# Altium PCB 主板-双BH(1).PcbDoc (part 9 of 13)
Units mm, origin at the board's own origin, x right, y up, seen from the top; angles counter-clockwise.
Board outline 97.69 x 103.45 mm, 2 copper layers (Top Layer, Bottom Layer); 78 components, 75 nets, 243 pads, 279 vias.
Unrouted connection lines stored in the file: 7.
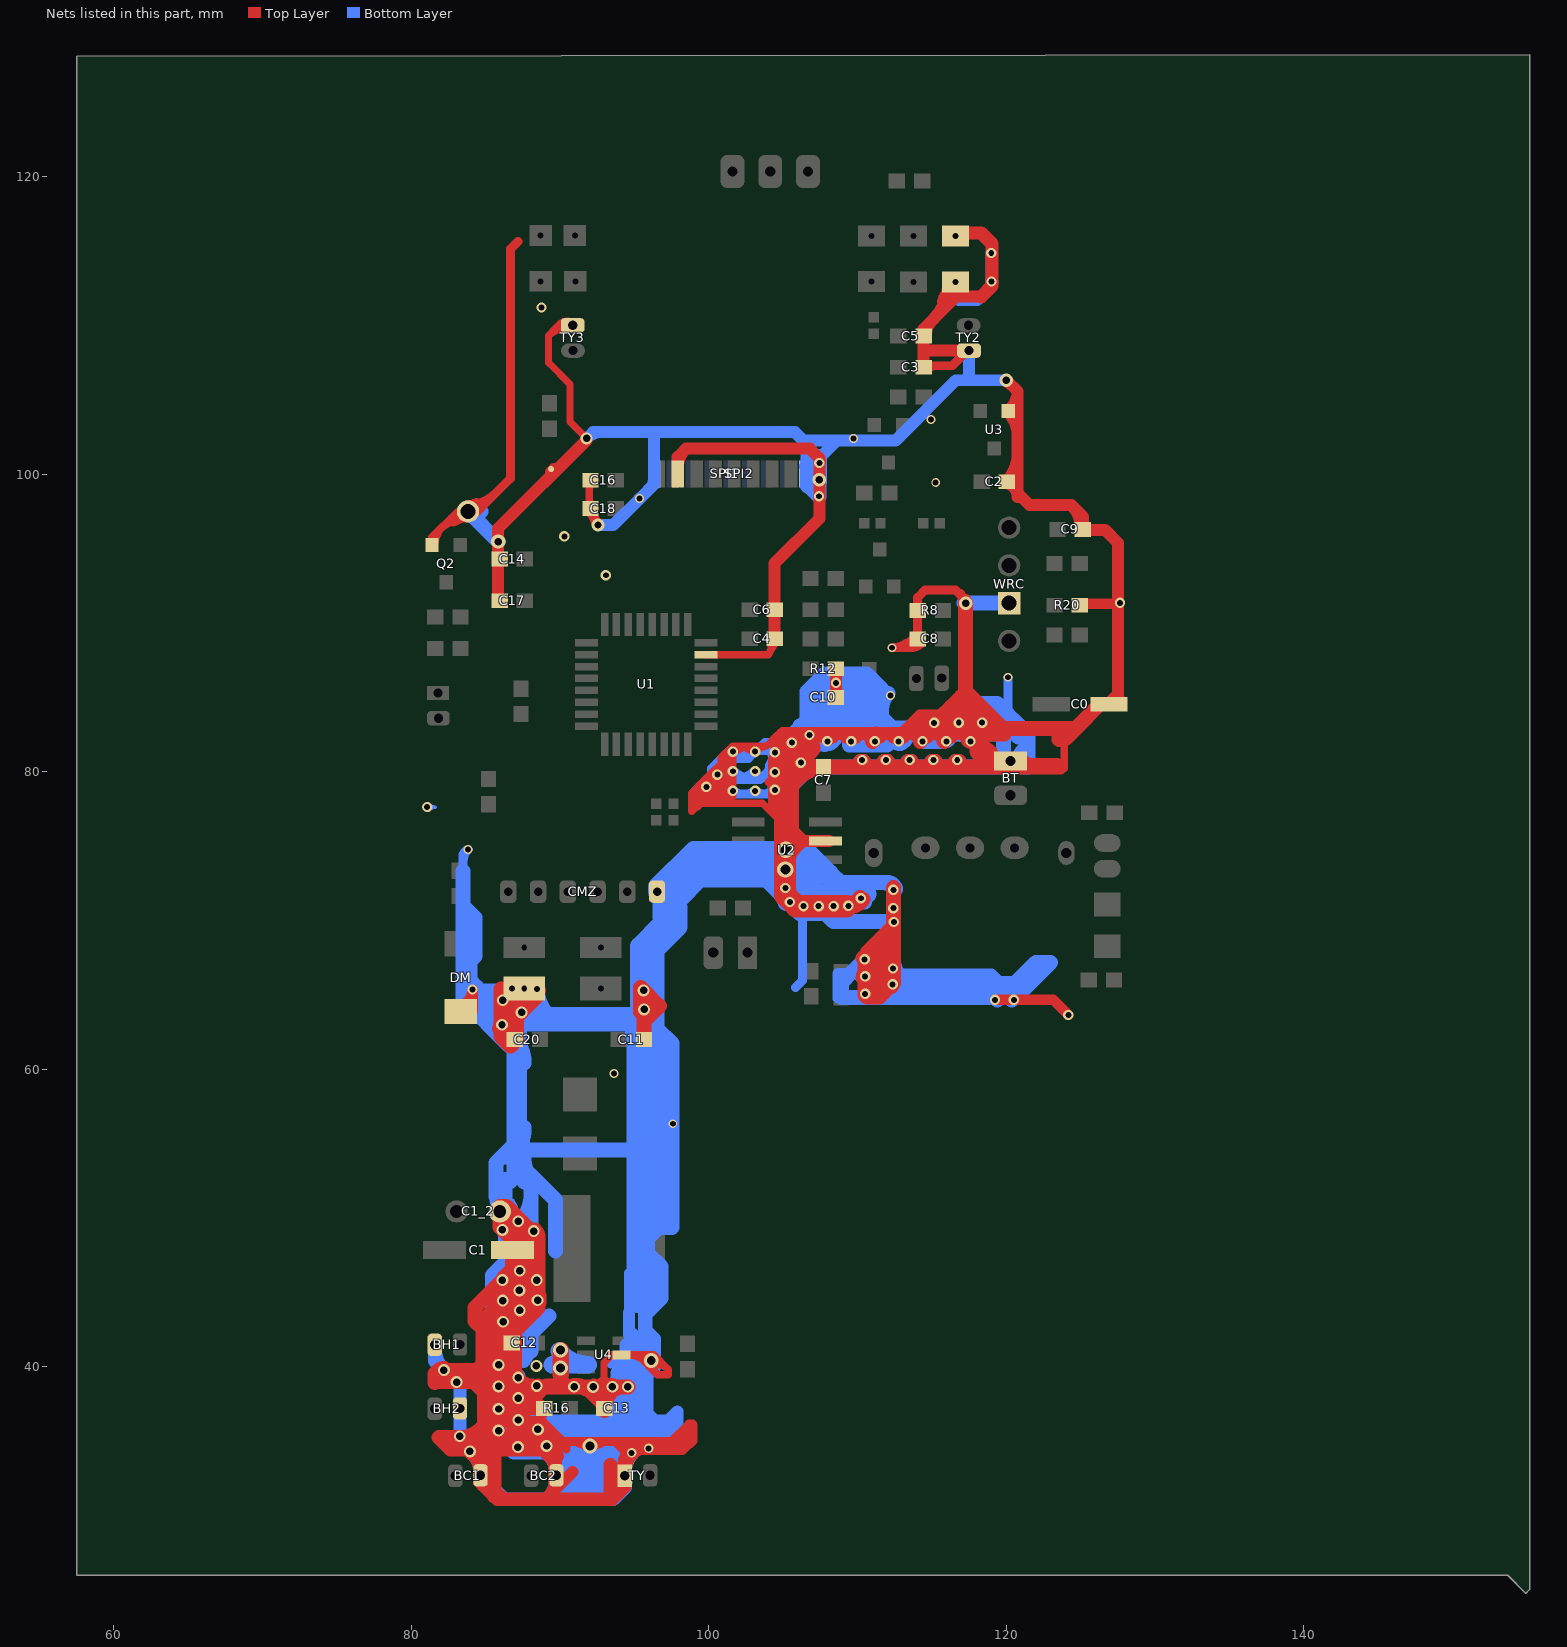
[diagram p9: the nets of this part, all layers, seen from the top]

## Via types
v1: diameter 0.7, hole 0.4, Top Layer to Bottom Layer, 108 vias
v2: diameter 0.68, hole 0.4, Top Layer to Bottom Layer, 87 vias
v3: diameter 0.8, hole 0.5, Top Layer to Bottom Layer, tented both sides, 33 vias
v4: diameter 0.6, hole 0.4, Top Layer to Bottom Layer, 12 vias
v5: diameter 0.9, hole 0.5, Top Layer to Bottom Layer, 8 vias
v6: diameter 0.8, hole 0.5, Top Layer to Bottom Layer, 6 vias
v7: diameter 1, hole 0.75, Top Layer to Bottom Layer, tented both sides, 5 vias
v8: diameter 3.4, hole 2.9, Top Layer to Bottom Layer, 4 vias
v9: diameter 1, hole 0.6, Top Layer to Bottom Layer, tented both sides, 3 vias
v10: diameter 1, hole 0.56, Top Layer to Bottom Layer, tented both sides, 2 vias
v11: diameter 1.1, hole 0.68, Top Layer to Bottom Layer, 2 vias
v12: diameter 0.8, hole 0.4, Top Layer to Bottom Layer, 2 vias
v13: diameter 0.65, hole 0.4, Top Layer to Bottom Layer, tented both sides, 2 vias
v14: diameter 1, hole 0.6, Top Layer to Bottom Layer, tented bottom, 1 vias
v15: diameter 0.7, hole 0.4, Top Layer to Bottom Layer, tented bottom, 1 vias
v16: diameter 0.95, hole 0.5, Top Layer to Bottom Layer, 1 vias
v17: diameter 0.64, hole 0.4, Top Layer to Bottom Layer, 1 vias
v18: diameter 0.62, hole 0.4, Top Layer to Bottom Layer, 1 vias

## Nets (pads, with @x,y where several pads share a name; then routed paths per layer and width w, separated by ;. In a path a pad name is that pad's centre, name@x,y a point inside that pad or via, vN(x,y) a via of type N, cw(c..) or ccw(c..) an arc to the next point about the centre after c; other vN are vias at no path point) (continued)
GND: (continued)
  Bottom Layer w1: 83.488,73.33 83.488,70.995 ; 84.072,67.384 84.285,67.597 84.285,70.198 84.072,70.411 83.488,70.995 ; v2(84.125,65.354) 84.446,65.033 ; 84.7,97.511 pad.4@83.82,97.511 v16(85.852,95.479) ; 85.15,63.969 85.595,63.627 ; 85.598,43.155 85.598,43.409 85.555,43.452 85.555,40.114 86.055,40.615 86.055,41.046 ; 85.674,41.046 86.055,41.046 ; v3@86.055,40.005 86.055,39 86.055,36.297 ; 86.055,42.215 86.055,41.046 ; 86.055,51.638 85.7,51.638 ; v3@86.177,63.063 cw(c85.121,62.007) 86.614,62.007 ; v3@86.178,64.545 ccw(c86.015,65.29) pad.0@86.657,64.878 ; 86.309,52.603 86.317,51.021 86.32,50.444 86.326,49.201 86.33,48.332 86.665,48.666 86.665,50.673 ; 86.335,47.498 86.332,48.014 ; 86.376,62.451 86.614,62.214 ; v3@86.424,64.515 ccw(c85.805,65.194) pad.0@86.706,65.373 ; pad.0@86.521,65.432 pad.0@87.6,65.432 v1(86.766,65.43) pad.0@86.664,65.429 ; 86.614,36.386 86.614,38.938 ; 86.614,39.167 86.614,38.938 ; 86.614,52.426 86.911,52.722 86.911,61.917 86.614,62.214 ; 86.614,61.684 cw(c87.515,61.684) 86.878,62.322 ; 86.807,62.322 cw(c84.893,60.408) 87.6,60.408 ; 86.868,41.021 86.893,41.046 ; 86.919,35.458 93.472,35.458 ; 86.982,55.74 86.982,54.995 85.7,53.712 85.7,51.638 ; 87.274,63.269 87.274,54.902 87.6,54.576 ; v3@87.396,44.071 86.792,43.466 ; 87.6,52.68 87.6,54.576 ; 87.8,53.119 88.062,52.857 ; 87.916,43.561 87.147,42.792 ; v3@89.129,34.9 88.697,34.9 ; 89.256,43.409 88.062,42.215 ; 89.672,36.108 92.954,36.108 ; 89.704,47.777 89.704,51.215 88.062,52.857 ; 92.481,31.14 92.954,31.14 93.574,31.14 94.336,31.902 94.336,32.522 94.082,32.776 TY.2@94.082,33.096 ; 93.223,32.7 92.804,32.7 ; 93.604,32.085 93.604,33.426 ; 93.659,31.845 92.804,32.7 ; 93.721,31.907 93.659,31.969 93.574,32.055 ; 93.955,35.636 93.955,34.976 93.98,34.95 94.386,34.95 94.488,34.849 ; 94.183,33.884 94.488,34.188 ; 94.488,35.707 94.488,34.849 ; 94.615,37.186 94.656,37.144 ; 94.656,36.432 94.656,37.144 ; 94.742,36.108 94.092,36.108 ; 94.793,42.164 95.783,41.173 ; 94.92,41.758 94.92,39.345 95.783,40.208 95.783,41.173 ; 94.971,62.407 94.971,54.576 ; 95.098,49.835 95.758,50.495 ; 95.148,44.653 95.225,44.729 ; 95.148,46.228 95.148,46.076 ; 95.225,37.391 95.225,39.649 ; 95.225,44.12 95.225,44.729 ; 95.244,34.945 95.148,34.849 94.818,34.519 94.488,34.188 ; 95.326,48.844 95.326,48.057 95.898,48.628 ; 95.326,50.927 95.326,51.155 ; 95.326,62.763 95.326,54.576 94.971,54.576 ; 95.327,61.713 cw(c97.266,61.713) 95.895,63.084 ; 95.327,62.763 96.52,62.763 ; 95.824,63.084 cw(c94.758,62.017) 96.266,62.017 ; 95.838,63.074 cw(c95.5,62.386) 96.266,62.386 ; 95.858,63.069 cw(c95.831,62.381) 96.52,62.381 ; 95.898,44.552 95.898,45.402 ; 95.898,47.384 95.898,45.402 ; 95.898,49.416 95.898,48.984 ; 95.904,63.142 ccw(c96.52,63.454) 96.52,62.763 ; 95.961,49.708 96.19,49.708 ; 96.284,35.456 96.314,35.486 94.656,37.144 ; 96.441,35.486 96.7,35.486 97.231,36.017 ; 96.52,68.123 96.52,62.763 ; CMZ.2@96.53,71.944 97.866,71.944 ; 96.622,49.708 95.898,48.984 ; 96.977,49.708 95.898,48.628 ; 97.18,36.297 96.319,36.297 95.782,36.834 95.782,39.47 ; 103.745,72.836 106.096,70.485 106.319,70.485 107.823,70.485 ; v11(105.181,74.752) 106.705,74.752 108.179,73.279 108.179,73.254 ; 106.136,72.507 106.451,72.822 106.959,73.33 ; v1@106.782,82.524 v1@106.87,82.436 ; v1@107.417,98.501 v1(107.417,98.527) ; v5@107.417,99.593 v1(107.417,98.527) ; v5@107.442,99.492 v5(107.442,99.644) v1(107.442,100.762) v1@107.442,101.092 ; v1@108.179,70.915 v1@108.179,70.917 ; 108.179,71.806 108.179,72.517 ; 109.195,71.501 108.636,72.06 108.179,72.517 ; v1@109.449,71.247 110.49,71.247 v1(110.236,71.501) ; 109.466,86.335 109.466,82.525 ; 109.728,86.233 110.363,85.598 110.363,82.781 110.583,82.561 ; 109.957,66.523 112.166,66.523 112.42,66.269 ; 111.049,85.649 111.049,83.026 110.583,82.561 ; 112.598,65.227 113.005,64.821 ; 113.342,82.448 113.342,82.525 ; v1(114.375,82.042) 115.545,82.042 116.027,82.525 ; v5@117.17,91.345 WRC.2@120.2,91.345 ; BT.2@120.297,80.674 BT.2@120.297,80.315 ; 120.371,65.507 120.802,65.938 ; 120.828,82.321 119.99,83.16 119.99,83.287 ; 120.853,65.735 119.939,64.821 ; 83.488,66.505 ccw(c85.276,66.505) v2@84.012,65.241 ; 83.488,66.505 ccw(c85.276,66.505) v2@84.012,65.241 ; 83.488,66.505 ccw(c85.276,66.505) v2@84.012,65.241 ; 83.488,70.995 83.488,69.826 83.488,68.916 83.488,64.696 86.614,61.57 86.614,62.214 ; v2@83.965,65.354 ccw(c84.673,65.354) 84.172,64.853 ; v2@83.965,65.354 ccw(c84.673,65.354) 84.172,64.853 ; v2@83.965,65.354 ccw(c84.673,65.354) 84.172,64.853 ; v2@83.965,65.354 ccw(c84.673,65.354) 84.172,64.853 ; v2@83.965,65.354 ccw(c84.673,65.354) 84.172,64.853 ; v2@84.012,65.241 ccw(c84.514,65.744) 84.514,65.033 cw(c84.514,65.744) v2@84.012,65.241 ; 84.172,64.853 85.399,63.627 ; 84.172,64.853 84.352,65.033 84.446,65.033 ; 84.446,65.033 85.852,63.627 ; 84.446,65.033 85.647,65.033 ; 84.716,63.468 ccw(c86.106,64.858) v3@86.106,62.892 ; 84.716,63.468 ccw(c86.106,64.858) v3@86.106,62.892 ; 84.716,63.468 ccw(c86.106,64.858) v3@86.106,62.892 ; 85.399,63.627 cw(c85.399,62.792) v3@86.202,63.019 ; 85.399,63.627 cw(c85.399,62.792) v3@86.202,63.019 ; 85.399,63.627 cw(c85.399,62.792) v3@86.202,63.019 ; 85.399,63.627 85.595,63.627 ; 85.471,36.42 cw(c86.617,36.42) v3@85.807,37.231 ; 85.471,36.42 cw(c86.617,36.42) v3@85.807,37.231 ; 85.471,36.42 cw(c86.617,36.42) v3@85.807,37.231 ; 85.471,36.452 ccw(c86.617,36.452) v3@85.807,35.642 ; 85.471,36.452 ccw(c86.617,36.452) v3@85.807,35.642 ; 85.471,36.452 ccw(c86.617,36.452) v3@85.807,35.642 ; 85.471,37.9 ccw(c86.617,37.9) v3@85.807,37.089 ; 85.471,37.9 ccw(c86.617,37.9) v3@85.807,37.089 ; 85.471,37.9 ccw(c86.617,37.9) v3@85.807,37.089 ; 85.471,37.944 cw(c86.617,37.944) v3@85.807,38.755 ; 85.471,37.944 cw(c86.617,37.944) v3@85.807,38.755 ; 85.471,37.944 cw(c86.617,37.944) v3@85.807,38.755 ; 85.471,39.392 cw(c86.617,39.392) v3@85.807,40.203 ; 85.471,39.392 cw(c86.617,39.392) v3@85.807,40.203 ; 85.471,39.392 cw(c86.617,39.392) v3@85.807,40.203 ; 85.471,39.424 ccw(c86.617,39.424) v3@85.807,38.613 ; 85.471,39.424 ccw(c86.617,39.424) v3@85.807,38.613 ; 85.471,39.424 ccw(c86.617,39.424) v3@85.807,38.613 ; 85.471,40.872 ccw(c86.617,40.872) v3@85.807,40.061 ; 85.471,40.872 ccw(c86.617,40.872) v3@85.807,40.061 ; 85.471,40.872 ccw(c86.617,40.872) v3@85.807,40.061 ; 85.471,41.552 cw(c87.658,41.552) v3@86.111,43.098 ; 85.471,41.552 cw(c87.658,41.552) v3@86.111,43.098 ; 85.471,41.552 cw(c87.658,41.552) v3@86.111,43.098 ; 85.471,43.036 cw(c87.571,43.036) v3@86.086,44.521 ; 85.471,43.036 cw(c87.571,43.036) v3@86.086,44.521 ; 85.471,43.036 cw(c87.571,43.036) v3@86.086,44.521 ; 85.471,44.469 cw(c87.484,44.469) v3@86.061,45.892 ; 85.471,44.469 cw(c87.484,44.469) v3@86.061,45.892 ; 85.471,44.469 cw(c87.484,44.469) v3@86.061,45.892 ; 85.471,44.503 ccw(c87.658,44.503) v3@86.111,42.957 ; 85.471,44.503 ccw(c87.658,44.503) v3@86.111,42.957 ; 85.471,44.503 ccw(c87.658,44.503) v3@86.111,42.957 ; 85.471,45.864 ccw(c87.571,45.864) v3@86.086,44.379 ; 85.471,45.864 ccw(c87.571,45.864) v3@86.086,44.379 ; 85.471,45.864 ccw(c87.571,45.864) v3@86.086,44.379 ; 85.555,40.669 ccw(c86.415,40.669) v3@85.807,40.061 ; 85.555,40.669 ccw(c86.415,40.669) v3@85.807,40.061 ; 85.555,40.669 ccw(c86.415,40.669) v3@85.807,40.061 ; 85.555,41.754 cw(c87.455,41.754) v3@86.111,43.098 ; 85.555,41.754 cw(c87.455,41.754) v3@86.111,43.098 ; 85.555,41.754 cw(c87.455,41.754) v3@86.111,43.098 ; 85.595,63.627 85.852,63.627 ; 85.595,63.627 85.941,63.36 86.208,63.627 ; 85.647,65.033 cw(c85.647,64.34) 86.243,64.694 ccw(c85.647,64.34) 85.647,65.033 ; 85.647,65.033 86.157,64.523 86.157,63.754 ; 85.7,51.638 cw(c85.149,51.087) C1_2.1@85.755,50.599 ; 85.7,51.638 ccw(c87.13,51.638) C1_2.1@86.126,50.62 ; 85.7,51.638 cw(c85.149,51.087) C1_2.1@85.755,50.599 ; 85.7,51.638 ccw(c87.13,51.638) C1_2.1@86.126,50.62 ; 85.7,51.638 cw(c85.149,51.087) C1_2.1@85.755,50.599 ; 85.7,51.638 ccw(c87.13,51.638) C1_2.1@86.126,50.62 ; 85.7,51.638 86.665,50.673 ; 85.7,51.65 ccw(c87.158,51.65) C1_2.1@86.127,50.619 ; 85.7,51.65 ccw(c87.158,51.65) C1_2.1@86.127,50.619 ; 85.7,51.65 ccw(c87.158,51.65) C1_2.1@86.127,50.619 ; C1_2.1@85.772,50.618 ccw(c84.446,51.931) 86.312,51.94 ; C1_2.1@85.772,50.618 ccw(c84.446,51.931) 86.312,51.94 ; C1_2.1@85.772,50.618 ccw(c84.446,51.931) 86.312,51.94 ; C1_2.1@85.774,50.264 cw(c84.461,48.938) v3@86.327,48.947 ; C1_2.1@85.774,50.264 cw(c84.461,48.938) v3@86.327,48.947 ; C1_2.1@85.774,50.264 cw(c84.461,48.938) v3@86.327,48.947 ; v3@85.777,35.712 ccw(c86.578,35.712) 86.012,35.146 ; v3@85.777,35.712 ccw(c86.578,35.712) 86.012,35.146 ; v3@85.777,35.712 ccw(c86.578,35.712) 86.012,35.146 ; v3@85.777,37.16 ccw(c87.192,37.16) 86.192,36.16 ; v3@85.777,37.16 ccw(c87.192,37.16) 86.192,36.16 ; v3@85.777,37.16 ccw(c87.192,37.16) 86.192,36.16 ; v3@85.779,37.178 ccw(c86.76,37.001) 86.055,36.297 ; v3@85.779,37.178 ccw(c86.76,37.001) 86.055,36.297 ; v3@85.779,37.178 ccw(c86.76,37.001) 86.055,36.297 ; C1_2.1@85.801,50.241 cw(c84.534,48.528) 86.665,48.528 ; C1_2.1@85.801,50.241 cw(c84.534,48.528) 86.665,48.528 ; C1_2.1@85.801,50.241 cw(c84.534,48.528) 86.665,48.528 ; v3@85.807,35.783 cw(c87.046,34.543) v3@87.046,36.297 ; v3@85.807,35.783 cw(c87.046,34.543) v3@87.046,36.297 ; v3@85.807,35.783 cw(c87.046,34.543) v3@87.046,36.297 ; v3@85.807,37.089 ccw(c87.721,39.004) 87.721,36.297 ; v3@85.807,37.089 ccw(c87.721,39.004) 87.721,36.297 ; v3@85.807,37.089 ccw(c87.721,39.004) 87.721,36.297 ; 85.852,63.627 85.941,63.538 86.03,63.627 ; 85.852,63.627 86.03,63.627 ; v3@85.877,35.812 cw(c85.877,34.214) 87.008,35.344 ; v3@85.877,35.812 cw(c85.877,34.214) 87.008,35.344 ; v3@85.877,35.812 cw(c85.877,34.214) 87.008,35.344 ; v3@85.925,37.248 cw(c85.298,36.091) 86.614,36.091 ; v3@85.925,37.248 cw(c85.298,36.091) 86.614,36.091 ; v3@85.925,37.248 cw(c85.298,36.091) 86.614,36.091 ; v3@85.948,37.089 ccw(c84.341,38.697) 86.614,38.697 ; v3@85.948,37.089 ccw(c84.341,38.697) 86.614,38.697 ; v3@85.948,37.089 ccw(c84.341,38.697) 86.614,38.697 ; v3@85.948,38.755 cw(c84.341,37.147) 86.614,37.147 ; v3@85.948,38.755 cw(c84.341,37.147) 86.614,37.147 ; v3@85.948,38.755 cw(c84.341,37.147) 86.614,37.147 ; 85.95,42.624 85.95,42.472 86.792,43.314 86.792,43.466 ; 85.95,42.624 86.792,43.466 ; 85.95,42.624 85.95,46.405 86.332,46.787 ; C1_2.1@85.976,50.028 cw(c85.093,49.302) v3@86.231,49.19 ; C1_2.1@85.976,50.028 cw(c85.093,49.302) v3@86.231,49.19 ; C1_2.1@85.976,50.028 cw(c85.093,49.302) v3@86.231,49.19 ; C1_2.1@85.976,50.028 cw(c85.093,49.302) v3@86.231,49.19 ; C1_2.1@85.976,50.028 cw(c85.093,49.302) v3@86.231,49.19 ; C1_2.1@85.976,50.028 cw(c85.093,49.302) v3@86.231,49.19 ; v3@86.006,62.992 ccw(c87.972,62.992) 86.582,61.602 ; v3@86.006,62.992 ccw(c87.972,62.992) 86.582,61.602 ; v3@86.006,62.992 ccw(c87.972,62.992) 86.582,61.602 ; 86.007,63.472 cw(c85.528,62.992) v3@86.206,62.992 ; 86.007,63.472 cw(c85.528,62.992) v3@86.206,62.992 ; 86.007,63.472 cw(c85.528,62.992) v3@86.206,62.992 ; 86.007,63.472 cw(c85.528,62.992) v3@86.206,62.992 ; 86.007,63.472 cw(c85.528,62.992) v3@86.206,62.992 ; 86.007,63.472 cw(c85.528,62.992) v3@86.206,62.992 ; 86.007,63.472 cw(c85.528,62.992) v3@86.206,62.992 ; 86.007,63.472 cw(c85.528,62.992) v3@86.206,62.992 ; v3@86.008,62.973 cw(c86.722,63.112) 86.208,63.627 ; v3@86.008,62.973 cw(c86.722,63.112) 86.208,63.627 ; v3@86.008,62.973 cw(c86.722,63.112) 86.208,63.627 ; 86.03,63.627 ccw(c85.335,64.321) 86.25,64.679 cw(c85.335,64.321) 86.03,63.627 ; 86.03,63.627 86.157,63.754 ; 86.03,63.627 86.208,63.627 ; v3@86.031,45.822 cw(c88.182,45.822) 86.661,47.342 ; v3@86.031,45.822 cw(c88.182,45.822) 86.661,47.342 ; v3@86.031,45.822 cw(c88.182,45.822) 86.661,47.342 ; v3@86.033,45.802 cw(c87.104,46.015) 86.332,46.787 ; v3@86.033,45.802 cw(c87.104,46.015) 86.332,46.787 ; v3@86.033,45.802 cw(c87.104,46.015) 86.332,46.787 ; 86.048,41.046 cw(c86.048,38.931) 87.544,40.427 ; 86.048,41.046 cw(c86.048,38.931) 87.544,40.427 ; 86.048,41.046 cw(c86.048,38.931) 87.544,40.427 ; 86.055,36.297 92.765,36.297 92.954,36.108 ; 86.055,36.297 87.452,34.9 ; 86.055,41.046 86.893,41.046 ; v3@86.154,64.543 ccw(c86.175,65.306) pad.0@86.7,64.751 ; v3@86.154,64.543 ccw(c86.175,65.306) pad.0@86.7,64.751 ; v3@86.154,64.543 ccw(c86.175,65.306) pad.0@86.7,64.751 ; 86.157,63.754 ccw(c85.635,64.276) 86.239,64.701 cw(c85.635,64.276) 86.157,63.754 ; 86.157,63.754 ccw(c86.66,63.251) 86.015,62.95 cw(c86.66,63.251) 86.157,63.754 ; 86.168,49.606 cw(c86.952,49.962) C1_2.1@86.175,50.334 ; 86.168,49.606 cw(c86.952,49.962) C1_2.1@86.175,50.334 ; 86.168,49.606 cw(c86.952,49.962) C1_2.1@86.175,50.334 ; 86.168,49.606 cw(c86.952,49.962) C1_2.1@86.175,50.334 ; v3@86.168,62.913 ccw(c85.444,63.833) 86.614,63.833 ; v3@86.168,62.913 ccw(c85.444,63.833) 86.614,63.833 ; v3@86.168,62.913 ccw(c85.444,63.833) 86.614,63.833 ; C1_2.1@86.17,50.56 cw(c86.874,50.937) 86.181,51.333 ; C1_2.1@86.17,50.56 cw(c86.874,50.937) 86.181,51.333 ; C1_2.1@86.17,50.56 cw(c86.874,50.937) 86.181,51.333 ; C1_2.1@86.172,50.327 ccw(c86.892,49.956) v3@86.193,49.547 ; C1_2.1@86.172,50.327 ccw(c86.892,49.956) v3@86.193,49.547 ; C1_2.1@86.172,50.327 ccw(c86.892,49.956) v3@86.193,49.547 ; v3@86.182,49.286 cw(c85.692,48.445) 86.665,48.445 ; v3@86.182,49.286 cw(c85.692,48.445) 86.665,48.445 ; v3@86.182,49.286 cw(c85.692,48.445) 86.665,48.445 ; v3@86.182,49.286 cw(c85.692,48.445) 86.665,48.445 ; v3@86.182,49.286 cw(c85.692,48.445) 86.665,48.445 ; v3@86.182,49.286 cw(c85.692,48.445) 86.665,48.445 ; v3@86.185,49.284 cw(c85.632,48.411) 86.64,48.638 ; v3@86.185,49.284 cw(c85.632,48.411) 86.64,48.638 ; v3@86.185,49.284 cw(c85.632,48.411) 86.64,48.638 ; v3@86.185,49.284 cw(c85.632,48.411) 86.64,48.638 ; v3@86.185,49.284 cw(c85.632,48.411) 86.64,48.638 ; v3@86.185,49.284 cw(c85.632,48.411) 86.64,48.638 ; C1_2.1@86.197,50.402 ccw(c87.434,50.202) v3@86.453,49.421 ; C1_2.1@86.197,50.402 ccw(c87.434,50.202) v3@86.453,49.421 ; C1_2.1@86.197,50.402 ccw(c87.434,50.202) v3@86.453,49.421 ; 86.199,51.149 cw(c85.95,50.441) 86.675,50.635 ; 86.199,51.149 cw(c85.95,50.441) 86.675,50.635 ; 86.199,51.149 cw(c85.95,50.441) 86.675,50.635 ; v3@86.202,45.751 ccw(c84.778,47.175) 86.792,47.175 ; v3@86.202,45.751 ccw(c84.778,47.175) 86.792,47.175 ; v3@86.202,45.751 ccw(c84.778,47.175) 86.792,47.175 ; v3@86.202,45.892 cw(c84.778,44.469) 86.792,44.469 ; v3@86.202,45.892 cw(c84.778,44.469) 86.792,44.469 ; v3@86.202,45.892 cw(c84.778,44.469) 86.792,44.469 ; v3@86.202,49.129 ccw(c85.085,50.246) C1_2.1@86.665,50.246 ; v3@86.202,49.129 ccw(c85.085,50.246) C1_2.1@86.665,50.246 ; v3@86.202,49.129 ccw(c85.085,50.246) C1_2.1@86.665,50.246 ; v3@86.222,44.526 cw(c85.143,43.279) 86.792,43.279 ; v3@86.222,44.526 cw(c85.143,43.279) 86.792,43.279 ; v3@86.222,44.526 cw(c85.143,43.279) 86.792,43.279 ; v3@86.228,44.379 ccw(c84.865,45.742) 86.792,45.742 ; v3@86.228,44.379 ccw(c84.865,45.742) 86.792,45.742 ; v3@86.228,44.379 ccw(c84.865,45.742) 86.792,45.742 ; pad.0@86.244,64.693 cw(c85.603,64.327) 86.315,64.132 ; pad.0@86.244,64.693 cw(c85.603,64.327) 86.315,64.132 ; pad.0@86.244,64.693 cw(c85.603,64.327) 86.315,64.132 ; v3@86.253,42.957 ccw(c84.952,44.258) 86.792,44.258 ; v3@86.253,42.957 ccw(c84.952,44.258) 86.792,44.258 ; v3@86.253,42.957 ccw(c84.952,44.258) 86.792,44.258 ; 86.303,34.855 ccw(c87.173,35.725) v3@87.173,34.495 ; 86.303,34.855 ccw(c87.173,35.725) v3@87.173,34.495 ; 86.303,34.855 ccw(c87.173,35.725) v3@87.173,34.495 ; 86.332,46.787 86.332,48.014 ; 86.332,48.014 86.792,48.473 86.792,43.466 ; 86.332,48.014 87.333,48.014 85.471,46.152 85.471,39 85.471,35.687 86.893,34.265 88.925,34.265 v3@89.002,34.341 ; pad.0@86.396,64.909 ccw(c86.097,65.748) pad.0@86.902,65.366 ; pad.0@86.396,64.909 ccw(c86.097,65.748) pad.0@86.902,65.366 ; pad.0@86.396,64.909 ccw(c86.097,65.748) pad.0@86.902,65.366 ; 86.614,36.727 cw(c88.367,36.727) v3@87.127,37.967 ; 86.614,36.727 cw(c88.367,36.727) v3@87.127,37.967 ; 86.614,36.727 cw(c88.367,36.727) v3@87.127,37.967 ; 86.614,37.592 ccw(c88.367,37.592) v3@87.127,36.352 ; 86.614,37.592 ccw(c88.367,37.592) v3@87.127,36.352 ; 86.614,37.592 ccw(c88.367,37.592) v3@87.127,36.352 ; 86.614,38.099 cw(c88.367,38.099) v3@87.127,39.339 ; 86.614,38.099 cw(c88.367,38.099) v3@87.127,39.339 ; 86.614,38.099 cw(c88.367,38.099) v3@87.127,39.339 ; 86.614,38.597 cw(c87.421,38.597) v3@87.167,39.363 ; 86.614,38.597 cw(c87.421,38.597) v3@87.167,39.363 ; 86.614,38.597 cw(c87.421,38.597) v3@87.167,39.363 ; 86.614,38.597 cw(c87.421,38.597) v3@87.167,39.363 ; 86.614,38.597 cw(c87.421,38.597) v3@87.167,39.363 ; 86.614,38.597 cw(c87.421,38.597) v3@87.167,39.363 ; 86.614,38.675 cw(c87.319,38.675) v3@87.178,39.366 ; 86.614,38.675 cw(c87.319,38.675) v3@87.178,39.366 ; 86.614,38.675 cw(c87.319,38.675) v3@87.178,39.366 ; 86.614,38.938 ccw(c88.078,38.938) v3@87.134,37.82 ; 86.614,38.938 ccw(c88.078,38.938) v3@87.134,37.82 ; 86.614,38.938 ccw(c88.078,38.938) v3@87.134,37.82 ; 86.614,62.109 cw(c89.148,62.109) v3@87.356,63.901 ; 86.614,62.109 cw(c89.148,62.109) v3@87.356,63.901 ; 86.614,62.109 cw(c89.148,62.109) v3@87.356,63.901 ; 86.614,62.214 86.614,63.833 ; 86.665,48.738 cw(c88.245,48.738) v3@87.127,49.855 ; 86.665,48.738 cw(c88.245,48.738) v3@87.127,49.855 ; 86.665,48.738 cw(c88.245,48.738) v3@87.127,49.855 ; 86.665,50.673 ccw(c87.893,50.673) v3@87.137,49.705 ; 86.665,50.673 ccw(c87.893,50.673) v3@87.137,49.705 ; 86.665,50.673 ccw(c87.893,50.673) v3@87.137,49.705 ; 86.731,53.985 ccw(c84.633,56.083) 87.6,56.083 ; 86.731,53.985 ccw(c84.633,56.083) 87.6,56.083 ; 86.731,53.985 ccw(c84.633,56.083) 87.6,56.083 ; 86.742,53.906 cw(c85.902,52.43) 87.6,52.43 ; 86.742,53.906 cw(c85.902,52.43) 87.6,52.43 ; 86.742,53.906 cw(c85.902,52.43) 87.6,52.43 ; 86.792,43.094 cw(c87.689,43.094) v3@87.251,43.877 ; 86.792,43.094 cw(c87.689,43.094) v3@87.251,43.877 ; 86.792,43.094 cw(c87.689,43.094) v3@87.251,43.877 ; 86.792,43.187 cw(c87.54,43.187) v3@87.263,43.882 ; 86.792,43.187 cw(c87.54,43.187) v3@87.263,43.882 ; 86.792,43.187 cw(c87.54,43.187) v3@87.263,43.882 ; 86.792,43.187 cw(c87.54,43.187) v3@87.263,43.882 ; 86.792,43.187 cw(c87.54,43.187) v3@87.263,43.882 ; 86.792,43.187 cw(c87.54,43.187) v3@87.263,43.882 ; 86.792,44.212 cw(c88.198,44.212) v3@87.204,45.207 ; 86.792,44.212 cw(c88.198,44.212) v3@87.204,45.207 ; 86.792,44.212 cw(c88.198,44.212) v3@87.204,45.207 ; 86.792,44.775 ccw(c88.285,44.775) v3@87.229,43.719 ; 86.792,44.775 ccw(c88.285,44.775) v3@87.229,43.719 ; 86.792,44.775 ccw(c88.285,44.775) v3@87.229,43.719 ; 86.792,45.472 cw(c88.285,45.472) v3@87.229,46.527 ; 86.792,45.472 cw(c88.285,45.472) v3@87.229,46.527 ; 86.792,45.472 cw(c88.285,45.472) v3@87.229,46.527 ; 86.792,46.059 ccw(c88.198,46.059) v3@87.204,45.065 ; 86.792,46.059 ccw(c88.198,46.059) v3@87.204,45.065 ; 86.792,46.059 ccw(c88.198,46.059) v3@87.204,45.065 ; 86.792,47.442 ccw(c88.285,47.442) v3@87.229,46.386 ; 86.792,47.442 ccw(c88.285,47.442) v3@87.229,46.386 ; 86.792,47.442 ccw(c88.285,47.442) v3@87.229,46.386 ; 86.893,41.046 86.893,42.088 88.062,43.256 ; 86.893,41.046 88.062,41.046 88.062,42.215 ; 86.93,35.421 cw(c86.104,34.595) v3@87.273,34.595 ; 86.93,35.421 cw(c86.104,34.595) v3@87.273,34.595 ; 86.93,35.421 cw(c86.104,34.595) v3@87.273,34.595 ; v3@87.102,34.524 ccw(c87.729,35.151) 87.729,34.265 ; v3@87.102,34.524 ccw(c87.729,35.151) 87.729,34.265 ; v3@87.102,34.524 ccw(c87.729,35.151) 87.729,34.265 ; v3@87.102,34.666 cw(c87.667,34.1) 87.667,34.9 ; v3@87.102,34.666 cw(c89.016,32.751) 89.016,35.458 ; v3@87.102,34.666 cw(c87.667,34.1) 87.667,34.9 ; v3@87.102,34.666 cw(c89.016,32.751) 89.016,35.458 ; v3@87.102,34.666 cw(c87.667,34.1) 87.667,34.9 ; v3@87.102,34.666 cw(c89.016,32.751) 89.016,35.458 ; v3@87.104,36.456 ccw(c88.505,35.952) 87.452,34.9 ; v3@87.104,36.456 ccw(c88.505,35.952) 87.452,34.9 ; v3@87.104,36.456 ccw(c88.505,35.952) 87.452,34.9 ; 87.147,42.792 ccw(c86.431,43.509) v3@87.395,43.82 ; 87.147,42.792 ccw(c86.431,43.509) v3@87.395,43.82 ; 87.147,42.792 ccw(c86.431,43.509) v3@87.395,43.82 ; 87.181,35.37 cw(c86.312,34.868) v3@87.268,34.565 ; 87.181,35.37 cw(c86.312,34.868) v3@87.268,34.565 ; 87.181,35.37 cw(c86.312,34.868) v3@87.268,34.565 ; v3@87.269,49.713 ccw(c85.355,51.627) 88.062,51.627 ; v3@87.269,49.713 ccw(c85.355,51.627) 88.062,51.627 ; v3@87.269,49.713 ccw(c85.355,51.627) 88.062,51.627 ; v3@87.269,49.855 cw(c85.355,47.941) 88.062,47.941 ; v3@87.269,49.855 cw(c85.355,47.941) 88.062,47.941 ; v3@87.269,49.855 cw(c85.355,47.941) 88.062,47.941 ; v3@87.333,43.884 cw(c86.977,42.859) 88.062,42.859 ; v3@87.333,43.884 cw(c86.977,42.859) 88.062,42.859 ; v3@87.333,43.884 cw(c86.977,42.859) 88.062,42.859 ; v3@87.345,45.065 ccw(c85.615,46.795) 88.062,46.795 ; v3@87.345,45.065 ccw(c85.615,46.795) 88.062,46.795 ; v3@87.345,45.065 ccw(c85.615,46.795) 88.062,46.795 ; v3@87.345,45.207 cw(c85.615,43.476) 88.062,43.476 ; v3@87.345,45.207 cw(c85.615,43.476) 88.062,43.476 ; v3@87.345,45.207 cw(c85.615,43.476) 88.062,43.476 ; v3@87.371,43.719 ccw(c85.702,45.388) 88.062,45.388 ; v3@87.371,43.719 ccw(c85.702,45.388) 88.062,45.388 ; v3@87.371,43.719 ccw(c85.702,45.388) 88.062,45.388 ; v3@87.371,46.386 ccw(c85.702,48.055) 88.062,48.055 ; v3@87.371,46.386 ccw(c85.702,48.055) 88.062,48.055 ; v3@87.371,46.386 ccw(c85.702,48.055) 88.062,48.055 ; v3@87.371,46.527 cw(c85.702,44.858) 88.062,44.858 ; v3@87.371,46.527 cw(c85.702,44.858) 88.062,44.858 ; v3@87.371,46.527 cw(c85.702,44.858) 88.062,44.858 ; 87.444,35.458 cw(c87.444,33.011) v3@89.174,34.742 ; 87.444,35.458 cw(c87.444,33.011) v3@89.174,34.742 ; 87.444,35.458 cw(c87.444,33.011) v3@89.174,34.742 ; 87.452,34.9 ccw(c87.452,36.115) v3@88.615,35.759 ; 87.452,34.9 ccw(c87.452,36.115) v3@88.615,35.759 ; 87.452,34.9 ccw(c87.452,36.115) v3@88.615,35.759 ; 87.452,34.9 88.697,34.9 ; v3@87.459,49.556 ccw(c88.479,50.207) v3@88.218,49.026 ; v3@87.459,49.556 ccw(c88.479,50.207) v3@88.218,49.026 ; v3@87.459,49.556 ccw(c88.479,50.207) v3@88.218,49.026 ; v3@87.534,36.297 cw(c87.534,34.804) v3@88.59,35.859 ; v3@87.534,36.297 cw(c87.534,34.804) v3@88.59,35.859 ; v3@87.534,36.297 cw(c87.534,34.804) v3@88.59,35.859 ; 87.544,40.498 ccw(c86.293,41.748) 88.062,41.748 ; 87.544,40.498 ccw(c86.293,41.748) 88.062,41.748 ; 87.544,40.498 ccw(c86.293,41.748) 88.062,41.748 ; 87.6,53.869 ccw(c89.124,53.869) 88.046,52.791 ; 87.6,53.869 ccw(c89.124,53.869) 88.046,52.791 ; 87.6,53.869 ccw(c89.124,53.869) 88.046,52.791 ; 87.6,54.576 94.971,54.576 ; 87.963,35.458 ccw(c87.963,36.344) v3@88.59,35.718 ; 87.963,35.458 ccw(c87.963,36.344) v3@88.59,35.718 ; 87.963,35.458 ccw(c87.963,36.344) v3@88.59,35.718 ; 88.062,42.215 88.062,43.256 ; 88.062,43.256 88.062,52.857 ; 88.062,43.674 cw(c89.295,43.674) v3@88.423,44.546 ; 88.062,43.674 cw(c89.295,43.674) v3@88.423,44.546 ; 88.062,43.674 cw(c89.295,43.674) v3@88.423,44.546 ; 88.062,45.143 cw(c89.121,45.143) v3@88.372,45.892 ; 88.062,45.143 cw(c89.121,45.143) v3@88.372,45.892 ; 88.062,45.143 cw(c89.121,45.143) v3@88.372,45.892 ; 88.062,45.276 ccw(c89.295,45.276) v3@88.423,44.405 ; 88.062,45.276 ccw(c89.295,45.276) v3@88.423,44.405 ; 88.062,45.276 ccw(c89.295,45.276) v3@88.423,44.405 ; 88.062,46.5 ccw(c89.121,46.5) v3@88.372,45.751 ; 88.062,46.5 ccw(c89.121,46.5) v3@88.372,45.751 ; 88.062,46.5 ccw(c89.121,46.5) v3@88.372,45.751 ; 88.081,35.149 ccw(c87.614,36.095) v3@88.614,35.756 ; 88.081,35.149 ccw(c87.614,36.095) v3@88.614,35.756 ; 88.081,35.149 ccw(c87.614,36.095) v3@88.614,35.756 ; 88.081,35.149 ccw(c87.614,36.095) v3@88.614,35.756 ; 88.081,35.149 ccw(c87.614,36.095) v3@88.614,35.756 ; 88.081,35.149 ccw(c87.614,36.095) v3@88.614,35.756 ; 88.363,34.265 ccw(c88.363,35.411) v3@89.174,34.6 ; 88.363,34.265 ccw(c88.363,35.411) v3@89.174,34.6 ; 88.363,34.265 ccw(c88.363,35.411) v3@89.174,34.6 ; v3@88.448,35.718 ccw(c89.075,36.344) 89.075,35.458 ; v3@88.448,35.718 ccw(c89.075,36.344) 89.075,35.458 ; v3@88.448,35.718 ccw(c89.075,36.344) 89.075,35.458 ; v3@88.448,35.859 cw(c89.504,34.804) 89.504,36.297 ; v3@88.448,35.859 cw(c89.504,34.804) 89.504,36.297 ; v3@88.448,35.859 cw(c89.504,34.804) 89.504,36.297 ; v3@88.453,35.713 ccw(c89.109,36.462) 89.175,35.469 ; v3@88.453,35.713 ccw(c89.109,36.462) 89.175,35.469 ; v3@88.453,35.713 ccw(c89.109,36.462) 89.175,35.469 ; v3@88.453,35.713 ccw(c89.109,36.462) 89.175,35.469 ; v3@88.453,35.713 ccw(c89.109,36.462) 89.175,35.469 ; v3@88.453,35.713 ccw(c89.109,36.462) 89.175,35.469 ; 88.697,34.9 v3@89.128,34.468 ; v3@89.002,34.341 v3@89.129,34.468 ; v3@89.002,34.341 89.51,33.833 ; v3@89.002,34.341 88.874,34.468 v3@89.128,34.468 ; v3@89.003,34.671 ccw(c89.804,34.671) 89.238,34.105 ; v3@89.003,34.671 ccw(c89.804,34.671) 89.238,34.105 ; v3@89.003,34.671 ccw(c89.804,34.671) 89.238,34.105 ; v3@89.012,34.631 ccw(c89.764,34.959) 89.764,34.138 ; v3@89.012,34.631 ccw(c89.764,34.959) 89.764,34.138 ; v3@89.012,34.631 ccw(c89.764,34.959) 89.764,34.138 ; v3@89.032,34.6 ccw(c90.149,35.716) 90.149,34.138 ; v3@89.032,34.6 ccw(c90.149,35.716) 90.149,34.138 ; v3@89.032,34.6 ccw(c90.149,35.716) 90.149,34.138 ; v3@89.032,34.742 cw(c90.763,33.011) 90.763,35.458 ; v3@89.032,34.742 cw(c90.763,33.011) 90.763,35.458 ; v3@89.032,34.742 cw(c90.763,33.011) 90.763,35.458 ; v3@89.129,34.468 89.332,34.468 89.764,34.036 ; v3@89.128,34.468 94.107,34.468 ; v3@89.142,34.763 cw(c88.741,33.822) 89.764,33.822 ; v3@89.142,34.763 cw(c88.741,33.822) 89.764,33.822 ; v3@89.142,34.763 cw(c88.741,33.822) 89.764,33.822 ; v3@89.149,34.76 cw(c88.634,33.754) 89.764,33.754 ; v3@89.149,34.76 cw(c88.634,33.754) 89.764,33.754 ; v3@89.149,34.76 cw(c88.634,33.754) 89.764,33.754 ; 89.368,33.974 cw(c88.364,32.97) BC2.1@89.784,32.97 ; 89.368,33.974 cw(c88.364,32.97) BC2.1@89.784,32.97 ; 89.368,33.974 cw(c88.364,32.97) BC2.1@89.784,32.97 ; 89.51,33.833 cw(c88.813,33.136) BC2.1@89.784,32.967 ; 89.51,33.833 cw(c88.813,33.136) BC2.1@89.784,32.967 ; 89.51,33.833 cw(c88.813,33.136) BC2.1@89.784,32.967 ; BC2.1@89.746,32.979 cw(c90.49,32.584) 90.49,33.426 ; BC2.1@89.746,32.979 cw(c90.49,32.584) 90.49,33.426 ; BC2.1@89.746,32.979 cw(c90.49,32.584) 90.49,33.426 ; BC2.1@89.75,32.416 ccw(c91.499,34.165) 91.499,31.691 ; BC2.1@89.75,32.416 ccw(c91.499,34.165) 91.499,31.691 ; BC2.1@89.75,32.416 ccw(c91.499,34.165) 91.499,31.691 ; BC2.1@89.75,32.984 cw(c90.817,31.917) 90.817,33.426 ; BC2.1@89.75,32.984 cw(c90.817,31.917) 90.817,33.426 ; BC2.1@89.75,32.984 cw(c90.817,31.917) 90.817,33.426 ; 89.764,31.166 ccw(c89.118,31.812) BC2.1@89.778,32.444 ; 89.764,31.166 ccw(c89.118,31.812) BC2.1@89.778,32.444 ; 89.764,31.166 ccw(c89.118,31.812) BC2.1@89.778,32.444 ; 89.764,31.166 89.764,31.75 BC2.1@89.764,32.7 ; 89.764,31.166 90.289,31.691 93.505,31.691 ; BC2.1@89.764,32.7 92.804,32.7 ; BC2.1@89.764,32.7 89.764,34.036 ; BC2.1@89.764,32.7 90.49,33.426 ; 89.764,34.036 89.764,34.138 ; 89.764,34.138 93.777,34.138 ; 90.123,35.458 cw(c90.123,32.77) v9(92.024,34.671) ; 90.123,35.458 cw(c90.123,32.77) v9(92.024,34.671) ; 90.123,35.458 cw(c90.123,32.77) v9(92.024,34.671) ; 90.49,33.426 93.604,33.426 ; 90.737,34.138 ccw(c90.737,35.958) v9(92.024,34.671) ; 90.737,34.138 ccw(c90.737,35.958) v9(92.024,34.671) ; 90.737,34.138 ccw(c90.737,35.958) v9(92.024,34.671) ; 91.535,34.468 ccw(c91.535,35.161) v9(92.024,34.671) ; 91.535,34.468 ccw(c91.535,35.161) v9(92.024,34.671) ; 91.535,34.468 ccw(c91.535,35.161) v9(92.024,34.671) ; v9(92.024,34.671) cw(c93.472,33.734) 93.472,35.458 ; v9(92.024,34.671) ccw(c92.514,35.161) 92.514,34.468 ; v9(92.024,34.671) ccw(c93.311,35.958) 93.311,34.138 ; v9(92.024,34.671) cw(c93.472,33.734) 93.472,35.458 ; v9(92.024,34.671) ccw(c92.514,35.161) 92.514,34.468 ; v9(92.024,34.671) ccw(c93.311,35.958) 93.311,34.138 ; v9(92.024,34.671) cw(c93.472,33.734) 93.472,35.458 ; v9(92.024,34.671) ccw(c92.514,35.161) 92.514,34.468 ; v9(92.024,34.671) ccw(c93.311,35.958) 93.311,34.138 ; 92.691,31.691 ccw(c92.691,34.077) TY.2@94.378,32.39 ; 92.691,31.691 ccw(c92.691,34.077) TY.2@94.378,32.39 ; 92.691,31.691 ccw(c92.691,34.077) TY.2@94.378,32.39 ; 92.954,36.108 94.092,36.108 ; 92.954,36.108 93.426,35.636 93.294,35.636 93.472,35.458 ; 92.954,36.108 93.523,36.678 94.092,36.108 ; 93.248,33.426 cw(c93.248,31.828) TY.2@94.378,32.958 ; 93.248,33.426 cw(c93.248,31.828) TY.2@94.378,32.958 ; 93.248,33.426 cw(c93.248,31.828) TY.2@94.378,32.958 ; 93.505,31.691 ccw(c93.505,32.59) TY.2@94.384,32.4 ; 93.505,31.691 ccw(c93.505,32.59) TY.2@94.384,32.4 ; 93.505,31.691 ccw(c93.505,32.59) TY.2@94.384,32.4 ; 93.574,32.055 ccw(c93.574,33.188) TY.2@94.378,32.39 ; 93.574,32.055 ccw(c93.574,33.188) TY.2@94.378,32.39 ; 93.574,32.055 ccw(c93.574,33.188) TY.2@94.378,32.39 ; 93.574,32.055 93.869,32.055 ; 93.604,32.693 cw(c94.333,32.693) TY.2@94.254,33.418 ; 93.604,32.693 cw(c94.333,32.693) TY.2@94.254,33.418 ; 93.604,32.693 cw(c94.333,32.693) TY.2@94.254,33.418 ; 93.604,33.426 cw(c93.604,32.55) TY.2@94.382,32.953 ; 93.604,33.426 cw(c93.604,32.55) TY.2@94.382,32.953 ; 93.604,33.426 cw(c93.604,32.55) TY.2@94.382,32.953 ; 93.777,34.138 cw(c94.515,33.4) v13@94.879,34.378 ; 93.777,34.138 cw(c94.515,33.4) v13@94.879,34.378 ; 93.777,34.138 cw(c94.515,33.4) v13@94.879,34.378 ; 93.777,34.138 94.107,34.468 ; 93.869,32.055 ccw(c93.869,32.612) TY.2@94.382,32.396 ; 93.869,32.055 ccw(c93.869,32.612) TY.2@94.382,32.396 ; 93.869,32.055 ccw(c93.869,32.612) TY.2@94.382,32.396 ; 94.063,31.63 ccw(c93.289,32.404) TY.2@94.384,32.404 ; 94.063,31.63 ccw(c93.289,32.404) TY.2@94.384,32.404 ; 94.063,31.63 ccw(c93.289,32.404) TY.2@94.384,32.404 ; 94.107,34.468 94.488,34.849 ; TY.2@94.347,32.934 cw(c95.204,33.473) 94.488,34.188 ; TY.2@94.347,32.934 cw(c95.204,33.473) 94.488,34.188 ; TY.2@94.347,32.934 cw(c95.204,33.473) 94.488,34.188 ; 94.488,33.883 cw(c95.094,33.883) v13@94.706,34.348 ; 94.488,33.883 cw(c95.094,33.883) v13@94.706,34.348 ; 94.488,33.883 cw(c95.094,33.883) v13@94.706,34.348 ; 94.488,34.188 94.488,34.519 94.488,34.849 ; 94.488,34.588 ccw(c95.193,34.588) v13@94.694,34.09 ; 94.488,34.588 ccw(c95.193,34.588) v13@94.694,34.09 ; 94.488,34.588 ccw(c95.193,34.588) v13@94.694,34.09 ; 94.488,34.588 ccw(c95.193,34.588) v13@94.694,34.09 ; 94.488,34.588 ccw(c95.193,34.588) v13@94.694,34.09 ; 94.488,34.588 ccw(c95.193,34.588) v13@94.694,34.09 ; 94.488,34.588 ccw(c95.193,34.588) v13@94.694,34.09 ; 94.488,34.588 ccw(c95.193,34.588) v13@94.694,34.09 ; 94.488,34.588 ccw(c95.193,34.588) v13@94.694,34.09 ; v6@94.616,38.573 ccw(c93.969,39.649) 95.225,39.649 ; v6@94.616,38.573 ccw(c93.969,39.649) 95.225,39.649 ; v6@94.616,38.573 ccw(c93.969,39.649) 95.225,39.649 ; v6@94.635,38.588 ccw(c93.947,39.276) 94.92,39.276 ; v6@94.635,38.588 ccw(c93.947,39.276) 94.92,39.276 ; v6@94.635,38.588 ccw(c93.947,39.276) 94.92,39.276 ; v6@94.635,38.588 ccw(c93.947,39.276) 94.92,39.276 ; v6@94.635,38.588 ccw(c93.947,39.276) 94.92,39.276 ; v6@94.635,38.588 ccw(c93.947,39.276) 94.92,39.276 ; v6@94.635,38.73 cw(c93.211,37.306) 95.225,37.306 ; v6@94.635,38.73 cw(c93.211,37.306) 95.225,37.306 ; v6@94.635,38.73 cw(c93.211,37.306) 95.225,37.306 ; 94.971,54.576 94.971,46.253 95.148,46.076 ; 95.148,46.076 95.225,46.152 95.225,44.729 ; 95.225,44.729 95.898,45.402 ; v3@95.702,65.233 ccw(c93.726,67.208) 96.52,67.208 ; v3@95.702,65.233 ccw(c93.726,67.208) 96.52,67.208 ; v3@95.702,65.233 ccw(c93.726,67.208) 96.52,67.208 ; v3@95.702,65.374 cw(c93.726,63.399) 96.52,63.399 ; v3@95.702,65.374 cw(c93.726,63.399) 96.52,63.399 ; v3@95.702,65.374 cw(c93.726,63.399) 96.52,63.399 ; v3@95.717,64.113 cw(c94.494,62.498) 96.52,62.498 ; v3@95.717,64.113 cw(c94.494,62.498) 96.52,62.498 ; v3@95.717,64.113 cw(c94.494,62.498) 96.52,62.498 ; v3@95.727,63.963 ccw(c93.813,65.877) 96.52,65.877 ; v3@95.727,63.963 ccw(c93.813,65.877) 96.52,65.877 ; v3@95.727,63.963 ccw(c93.813,65.877) 96.52,65.877 ; 95.758,50.495 96.368,49.886 ; 95.758,50.495 95.327,50.926 95.327,54.576 96.266,54.576 ; 95.782,39.47 ccw(c94.914,40.338) v14(96.139,40.411) ; 95.782,39.47 ccw(c94.914,40.338) v14(96.139,40.411) ; 95.782,39.47 ccw(c94.914,40.338) v14(96.139,40.411) ; 95.782,39.47 96.291,39.98 96.291,41.859 95.733,42.418 95.733,43.536 96.799,44.602 96.799,46.736 95.898,47.638 95.898,48.628 ; 95.783,41.173 ccw(c96.778,41.173) v14(96.139,40.411) ; 95.783,41.173 ccw(c96.778,41.173) v14(96.139,40.411) ; 95.783,41.173 ccw(c96.778,41.173) v14(96.139,40.411) ; 95.852,41.105 cw(c95.158,40.411) v14(96.139,40.411) ; 95.852,41.105 cw(c95.158,40.411) v14(96.139,40.411) ; 95.852,41.105 cw(c95.158,40.411) v14(96.139,40.411) ; 95.852,41.105 cw(c95.158,40.411) v14(96.139,40.411) ; 95.852,41.105 cw(c95.158,40.411) v14(96.139,40.411) ; 95.852,41.105 cw(c95.158,40.411) v14(96.139,40.411) ; 95.86,63.069 cw(c95.86,62.212) 96.465,62.818 ccw(c95.86,62.212) 95.86,63.069 ; 95.86,63.069 cw(c95.86,62.151) 96.509,62.8 ccw(c95.86,62.151) 95.86,63.069 ; 95.898,48.628 95.898,48.984 ; 95.898,48.628 95.542,48.628 95.898,48.984 ; 96.266,54.576 96.901,54.576 ; 96.266,54.576 96.266,62.509 96.901,61.874 96.901,54.576 ; 96.266,54.576 96.266,50.063 96.368,50.165 96.368,49.886 ; 96.368,49.886 95.834,49.352 97.536,49.352 97.536,54.576 ; 96.368,49.886 96.901,50.419 96.901,54.576 ; 96.52,62.763 97.536,61.747 97.536,54.576 ; 96.674,35.846 ccw(c96.502,36.017) 96.745,36.017 ; 96.674,35.846 ccw(c96.502,36.017) 96.745,36.017 ; 96.674,35.846 ccw(c96.502,36.017) 96.745,36.017 ; 96.901,54.576 97.536,54.576 ; 96.901,55.164 cw(c98.76,55.164) v4@97.445,56.479 ; 96.901,55.164 cw(c98.76,55.164) v4@97.445,56.479 ; 96.901,55.164 cw(c98.76,55.164) v4@97.445,56.479 ; 96.901,57.51 ccw(c98.76,57.51) v4@97.445,56.196 ; 96.901,57.51 ccw(c98.76,57.51) v4@97.445,56.196 ; 96.901,57.51 ccw(c98.76,57.51) v4@97.445,56.196 ; 104.111,72.47 ccw(c105.156,73.514) v1@105.156,72.037 ; 104.111,72.47 ccw(c105.156,73.514) v1@105.156,72.037 ; 104.111,72.47 ccw(c105.156,73.514) v1@105.156,72.037 ; v1@104.295,79.985 cw(c105.527,79.985) 104.656,80.856 ; v1@104.295,79.985 cw(c105.527,79.985) 104.656,80.856 ; v1@104.295,79.985 cw(c105.527,79.985) 104.656,80.856 ; v1@104.301,79.944 cw(c105.039,80.154) 104.496,80.696 ; v1@104.301,79.944 cw(c105.039,80.154) 104.496,80.696 ; v1@104.301,79.944 cw(c105.039,80.154) 104.496,80.696 ; v1@104.301,79.944 cw(c105.039,80.154) 104.496,80.696 ; v1@104.301,79.944 cw(c105.039,80.154) 104.496,80.696 ; v1@104.301,79.944 cw(c105.039,80.154) 104.496,80.696 ; v1@104.303,79.935 cw(c104.97,80.17) 104.47,80.67 ; v1@104.303,79.935 cw(c104.97,80.17) 104.47,80.67 ; v1@104.303,79.935 cw(c104.97,80.17) 104.47,80.67 ; v1@104.445,78.641 ccw(c104.445,80.364) 105.663,79.145 ; v1@104.445,78.641 ccw(c104.445,80.364) 105.663,79.145 ; v1@104.445,78.641 ccw(c104.445,80.364) 105.663,79.145 ; v1@104.445,81.155 ccw(c104.445,82.387) 105.316,81.516 ; v1@104.445,81.155 ccw(c104.445,82.387) 105.316,81.516 ; v1@104.445,81.155 ccw(c104.445,82.387) 105.316,81.516 ; 104.47,80.67 ccw(c104.044,81.096) v1@104.578,81.375 ; 104.47,80.67 ccw(c104.044,81.096) v1@104.578,81.375 ; 104.47,80.67 ccw(c104.044,81.096) v1@104.578,81.375 ; 104.47,80.67 104.496,80.696 ; 104.47,80.67 104.47,78.965 104.696,78.74 105.258,78.74 106.832,80.315 118.828,80.315 ; v1@104.485,81.161 ccw(c104.271,81.94) 105.08,81.94 ; v1@104.485,81.161 ccw(c104.271,81.94) 105.08,81.94 ; v1@104.485,81.161 ccw(c104.271,81.94) 105.08,81.94 ; v1@104.496,78.991 ccw(c103.915,79.572) v1@104.563,80.077 ; v1@104.496,78.991 ccw(c103.915,79.572) v1@104.563,80.077 ; v1@104.496,78.991 ccw(c103.915,79.572) v1@104.563,80.077 ; v1@104.496,78.991 104.496,80.696 ; v1@104.496,78.991 105.08,79.575 105.08,81.94 ; 104.496,80.696 ccw(c104.104,81.088) v1@104.572,81.386 ; 104.496,80.696 ccw(c104.104,81.088) v1@104.572,81.386 ; 104.496,80.696 ccw(c104.104,81.088) v1@104.572,81.386 ; 104.496,80.696 ccw(c104.104,81.088) v1@104.572,81.386 ; 104.496,80.696 ccw(c104.104,81.088) v1@104.572,81.386 ; 104.496,80.696 ccw(c104.104,81.088) v1@104.572,81.386 ; 104.496,80.696 106.235,82.436 ; v1@104.507,80.121 cw(c104.099,79.229) 105.08,79.229 ; v1@104.507,80.121 cw(c104.099,79.229) 105.08,79.229 ; v1@104.507,80.121 cw(c104.099,79.229) 105.08,79.229 ; v1@104.551,79.879 ccw(c103.274,81.155) 105.08,81.155 ; v1@104.551,79.879 ccw(c103.274,81.155) 105.08,81.155 ; v1@104.551,79.879 ccw(c103.274,81.155) 105.08,81.155 ; v1@104.551,81.411 cw(c103.275,80.135) 105.08,80.135 ; v1@104.551,81.411 cw(c103.275,80.135) 105.08,80.135 ; v1@104.551,81.411 cw(c103.275,80.135) 105.08,80.135 ; v1@105.006,72.187 ccw(c106.484,72.187) v1@105.439,71.142 ; v1@105.006,72.187 ccw(c106.484,72.187) v1@105.439,71.142 ; v1@105.006,72.187 ccw(c106.484,72.187) v1@105.439,71.142 ; 105.08,81.102 cw(c106.452,81.102) v1@105.482,82.072 ; 105.08,81.102 cw(c106.452,81.102) v1@105.482,82.072 ; 105.08,81.102 cw(c106.452,81.102) v1@105.482,82.072 ; 105.08,81.457 cw(c105.77,81.457) v1@105.537,82.107 ; 105.08,81.457 cw(c105.77,81.457) v1@105.537,82.107 ; 105.08,81.457 cw(c105.77,81.457) v1@105.537,82.107 ; 105.08,81.94 cw(c105.516,81.504) v1@105.611,82.114 ; 105.08,81.94 cw(c106.731,80.289) v1@106.785,82.624 ; 105.08,81.94 cw(c105.516,81.504) v1@105.611,82.114 ; 105.08,81.94 cw(c106.731,80.289) v1@106.785,82.624 ; 105.08,81.94 cw(c105.516,81.504) v1@105.611,82.114 ; 105.08,81.94 cw(c106.731,80.289) v1@106.785,82.624 ; 105.08,81.94 106.604,83.464 106.604,85.395 107.798,86.589 ; 105.122,81.976 cw(c105.521,81.499) v1@105.609,82.114 ; 105.122,81.976 cw(c105.521,81.499) v1@105.609,82.114 ; 105.122,81.976 cw(c105.521,81.499) v1@105.609,82.114 ; 105.308,79.198 ccw(c105.308,80.181) 106.004,79.486 ; 105.308,79.198 ccw(c105.308,80.181) 106.004,79.486 ; 105.308,79.198 ccw(c105.308,80.181) 106.004,79.486 ; 105.321,79.2 ccw(c105.05,80.211) 105.957,79.688 ; 105.321,79.2 ccw(c105.05,80.211) 105.957,79.688 ; 105.321,79.2 ccw(c105.05,80.211) 105.957,79.688 ; 105.321,79.2 ccw(c105.05,80.211) 105.957,79.688 ; 105.321,79.2 ccw(c105.05,80.211) 105.957,79.688 ; 105.321,79.2 ccw(c105.05,80.211) 105.957,79.688 ; v1@105.33,71.25 ccw(c106.375,72.295) v1@106.375,70.818 ; v1@105.33,71.25 ccw(c106.375,72.295) v1@106.375,70.818 ; v1@105.33,71.25 ccw(c106.375,72.295) v1@106.375,70.818 ; v1@105.438,81.966 cw(c106.241,81.966) 105.673,82.534 ; v1@105.438,81.966 cw(c106.241,81.966) 105.673,82.534 ; v1@105.438,81.966 cw(c106.241,81.966) 105.673,82.534 ; v1@105.456,82.037 cw(c105.996,81.746) 105.819,82.334 ; v1@105.456,82.037 cw(c105.996,81.746) 105.819,82.334 ; v1@105.456,82.037 cw(c105.996,81.746) 105.819,82.334 ; v1@105.467,82.054 cw(c106.219,81.503) 106.219,82.436 ; v1@105.467,82.054 cw(c106.219,81.503) 106.219,82.436 ; v1@105.467,82.054 cw(c106.219,81.503) 106.219,82.436 ; v1@105.469,82.057 cw(c106.235,81.47) 106.235,82.436 ; v1@105.469,82.057 cw(c106.235,81.47) 106.235,82.436 ; v1@105.469,82.057 cw(c106.235,81.47) 106.235,82.436 ; v1@105.469,82.057 cw(c106.235,81.47) 106.235,82.436 ; v1@105.469,82.057 cw(c106.235,81.47) 106.235,82.436 ; v1@105.469,82.057 cw(c106.235,81.47) 106.235,82.436 ; v1@105.482,82.072 cw(c106.36,81.194) 106.36,82.436 ; v1@105.482,82.072 cw(c106.36,81.194) 106.36,82.436 ; v1@105.482,82.072 cw(c106.36,81.194) 106.36,82.436 ; v1@105.644,81.827 ccw(c105.36,82.533) 106.121,82.533 ; v1@105.644,81.827 ccw(c105.36,82.533) 106.121,82.533 ; v1@105.644,81.827 ccw(c105.36,82.533) 106.121,82.533 ; v1@105.694,81.86 ccw(c104.662,82.891) 106.121,82.891 ; v1@105.694,81.86 ccw(c104.662,82.891) 106.121,82.891 ; v1@105.694,81.86 ccw(c104.662,82.891) 106.121,82.891 ; 105.789,79.271 ccw(c104.441,80.62) v1@106.347,80.62 ; 105.789,79.271 ccw(c104.441,80.62) v1@106.347,80.62 ; 105.789,79.271 ccw(c104.441,80.62) v1@106.347,80.62 ; v1@106.091,80.514 ccw(c106.571,80.993) 106.571,80.315 ; v1@106.091,80.514 ccw(c106.571,80.993) 106.571,80.315 ; v1@106.091,80.514 ccw(c106.571,80.993) 106.571,80.315 ; v1@106.091,80.514 ccw(c106.571,80.993) 106.571,80.315 ; v1@106.091,80.514 ccw(c106.571,80.993) 106.571,80.315 ; v1@106.091,80.514 ccw(c106.571,80.993) 106.571,80.315 ; 106.121,82.533 ccw(c106.657,83.069) v1@106.812,82.327 ; 106.121,82.533 ccw(c106.657,83.069) v1@106.812,82.327 ; 106.121,82.533 ccw(c106.657,83.069) v1@106.812,82.327 ; 106.121,82.533 106.121,83.083 ; 106.121,82.533 106.219,82.436 ; 106.121,83.083 ccw(c106.89,83.083) v1@106.755,82.326 ; 106.121,83.083 ccw(c106.89,83.083) v1@106.755,82.326 ; 106.121,83.083 ccw(c106.89,83.083) v1@106.755,82.326 ; 106.121,83.083 v1@106.68,82.525 ; 106.17,82.371 cw(c106.782,81.76) v1@106.782,82.624 ; 106.17,82.371 cw(c106.782,81.76) v1@106.782,82.624 ; 106.17,82.371 cw(c106.782,81.76) v1@106.782,82.624 ; 106.219,82.436 ccw(c106.599,82.816) v1@106.852,82.341 ; 106.219,82.436 ccw(c106.599,82.816) v1@106.852,82.341 ; 106.219,82.436 ccw(c106.599,82.816) v1@106.852,82.341 ; 106.219,82.436 106.235,82.436 ; 106.235,82.436 cw(c106.704,81.967) v1@106.804,82.622 ; 106.235,82.436 cw(c106.704,81.967) v1@106.804,82.622 ; 106.235,82.436 cw(c106.704,81.967) v1@106.804,82.622 ; 106.235,82.436 cw(c106.704,81.967) v1@106.804,82.622 ; 106.235,82.436 cw(c106.704,81.967) v1@106.804,82.622 ; 106.235,82.436 cw(c106.704,81.967) v1@106.804,82.622 ; 106.235,82.436 106.324,82.525 v1@106.68,82.525 ; 106.235,82.436 v1@106.87,82.436 ; v1@106.269,70.862 ccw(c107.178,71.771) 107.178,70.485 ; v1@106.269,70.862 ccw(c107.178,71.771) 107.178,70.485 ; v1@106.269,70.862 ccw(c107.178,71.771) 107.178,70.485 ; 106.588,70.485 ccw(c106.588,71.771) v1@107.497,70.862 ; 106.588,70.485 ccw(c106.588,71.771) v1@107.497,70.862 ; 106.588,70.485 ccw(c106.588,71.771) v1@107.497,70.862 ; SPI2.8@106.649,99.21 cw(c108.994,99.21) v1@107.336,100.868 ; SPI2.8@106.649,99.21 cw(c108.994,99.21) v1@107.336,100.868 ; SPI2.8@106.649,99.21 cw(c108.994,99.21) v1@107.336,100.868 ; SPI2.8@106.649,99.963 cw(c107.617,99.963) v1@107.41,100.908 ; SPI2.8@106.649,99.963 cw(c107.617,99.963) v1@107.41,100.908 ; SPI2.8@106.649,99.963 cw(c107.617,99.963) v1@107.41,100.908 ; SPI2.8@106.649,100.666 ccw(c107.773,100.666) v5@107.427,99.597 ; SPI2.8@106.649,100.666 ccw(c107.773,100.666) v5@107.427,99.597 ; SPI2.8@106.649,100.666 ccw(c107.773,100.666) v5@107.427,99.597 ; SPI2.8@106.649,100.666 106.649,99.294 v1(107.417,98.527) ; v1@106.652,82.398 ccw(c107.249,82.749) 107.249,82.057 ; v1@106.652,82.398 ccw(c107.249,82.749) 107.249,82.057 ; v1@106.652,82.398 ccw(c107.249,82.749) 107.249,82.057 ; v1@106.676,82.368 ccw(c107.427,83.119) 107.427,82.057 ; v1@106.676,82.368 ccw(c107.427,83.119) 107.427,82.057 ; v1@106.676,82.368 ccw(c107.427,83.119) 107.427,82.057 ; v1@106.68,82.525 v1@106.782,82.525 ; v1@106.782,82.525 106.782,84.303 ; v1@106.782,82.525 v1@106.931,82.525 ; 106.782,84.303 106.782,84.379 107.112,84.709 107.15,84.671 ; 106.782,84.303 107.15,84.671 ; v1@106.87,82.436 107.249,82.057 ; v1@106.87,82.436 107.975,82.436 ; 106.883,85.496 cw(c108.422,83.958) v1@108.57,86.129 ; 106.883,85.496 cw(c108.422,83.958) v1@108.57,86.129 ; 106.883,85.496 cw(c108.422,83.958) v1@108.57,86.129 ; 106.883,85.496 107.975,86.589 ; 106.883,85.496 106.883,85.014 107.95,86.081 ; v1@106.931,82.525 107.442,83.036 107.442,84.379 107.15,84.671 ; v1@106.931,82.525 107.975,82.525 ; v1@107.016,82.289 ccw(c107.975,83.248) v1@107.975,81.892 ; v1@107.016,82.289 ccw(c107.975,83.248) v1@107.975,81.892 ; v1@107.016,82.289 ccw(c107.975,83.248) v1@107.975,81.892 ; 107.15,84.671 107.975,85.496 ; 107.172,82.525 cw(c107.172,81.239) v1@108.081,82.148 ; 107.172,82.525 cw(c107.172,81.239) v1@108.081,82.148 ; 107.172,82.525 cw(c107.172,81.239) v1@108.081,82.148 ; v1@107.246,70.929 ccw(c107.823,71.082) 107.823,70.485 ; v1@107.246,70.929 ccw(c107.823,71.082) 107.823,70.485 ; v1@107.246,70.929 ccw(c107.823,71.082) 107.823,70.485 ; 107.249,82.057 ccw(c107.754,82.562) v1@108.034,81.904 ; 107.249,82.057 ccw(c107.754,82.562) v1@108.034,81.904 ; 107.249,82.057 ccw(c107.754,82.562) v1@108.034,81.904 ; 107.249,82.057 107.927,82.057 107.975,82.105 107.975,82.436 ; 107.387,82.436 cw(c107.387,81.454) v1@108.081,82.148 ; 107.387,82.436 cw(c107.387,81.454) v1@108.081,82.148 ; 107.387,82.436 cw(c107.387,81.454) v1@108.081,82.148 ; v5@107.406,99.679 ccw(c107.998,99.108) v1(107.417,98.527) ; v5@107.406,99.679 ccw(c107.998,99.108) v1(107.417,98.527) ; v5@107.406,99.679 ccw(c107.998,99.108) v1(107.417,98.527) ; 107.602,85.732 cw(c108.56,84.774) v1@108.56,86.129 ; 107.602,85.732 cw(c108.56,84.774) v1@108.56,86.129 ; 107.602,85.732 cw(c108.56,84.774) v1@108.56,86.129 ; 107.604,70.485 ccw(c107.604,71.771) v1@108.513,70.862 ; 107.604,70.485 ccw(c107.604,71.771) v1@108.513,70.862 ; 107.604,70.485 ccw(c107.604,71.771) v1@108.513,70.862 ; 107.798,86.589 cw(c107.798,85.577) v1@108.692,86.049 ; 107.798,86.589 cw(c107.798,85.577) v1@108.692,86.049 ; 107.798,86.589 cw(c107.798,85.577) v1@108.692,86.049 ; 107.798,86.589 110.617,86.589 111.633,85.573 111.633,83.668 112.092,83.208 ; 107.823,70.485 ccw(c107.823,71.314) v1@108.536,70.891 ; 107.823,70.485 ccw(c107.823,71.314) v1@108.536,70.891 ; 107.823,70.485 ccw(c107.823,71.314) v1@108.536,70.891 ; 107.823,70.485 108.382,69.926 ; v1@107.846,82.119 cw(c108.56,81.695) 108.56,82.525 ; v1@107.846,82.119 cw(c108.56,81.695) 108.56,82.525 ; v1@107.846,82.119 cw(c108.56,81.695) 108.56,82.525 ; v1@107.846,82.119 cw(c108.56,81.695) 108.56,82.525 ; v1@107.846,82.119 cw(c108.56,81.695) 108.56,82.525 ; v1@107.846,82.119 cw(c108.56,81.695) 108.56,82.525 ; v1@107.856,82.134 cw(c108.471,81.66) 108.471,82.436 ; v1@107.856,82.134 cw(c108.471,81.66) 108.471,82.436 ; v1@107.856,82.134 cw(c108.471,81.66) 108.471,82.436 ; v1@107.869,82.148 cw(c108.778,81.239) 108.778,82.525 ; v1@107.869,82.148 cw(c108.778,81.239) 108.778,82.525 ; v1@107.869,82.148 cw(c108.778,81.239) 108.778,82.525 ; 107.95,86.081 cw(c108.31,85.721) v1@108.664,86.087 ; 107.95,86.081 cw(c108.31,85.721) v1@108.664,86.087 ; 107.95,86.081 cw(c108.31,85.721) v1@108.664,86.087 ; 107.95,86.081 107.975,86.081 ; 107.975,82.436 108.471,82.436 ; 107.975,82.436 107.975,82.525 ; 107.975,82.525 107.975,85.496 ; 107.975,82.525 108.56,82.525 ; 107.975,84.931 cw(c109.608,84.931) v1@108.454,86.085 ; 107.975,84.931 cw(c109.608,84.931) v1@108.454,86.085 ; 107.975,84.931 cw(c109.608,84.931) v1@108.454,86.085 ; 107.975,85.221 cw(c109.004,85.221) v1@108.484,86.108 ; 107.975,85.221 cw(c109.004,85.221) v1@108.484,86.108 ; 107.975,85.221 cw(c109.004,85.221) v1@108.484,86.108 ; 107.975,85.221 cw(c109.004,85.221) v1@108.484,86.108 ; 107.975,85.221 cw(c109.004,85.221) v1@108.484,86.108 ; 107.975,85.221 cw(c109.004,85.221) v1@108.484,86.108 ; 107.975,85.496 v1@108.56,86.081 ; 107.975,85.496 107.975,86.081 ; 107.975,86.081 107.975,86.589 ; 107.975,86.081 v1@108.56,86.081 ; 107.975,86.589 ccw(c108.77,86.589) v1@108.511,85.837 ; 107.975,86.589 ccw(c108.77,86.589) v1@108.511,85.837 ; 107.975,86.589 ccw(c108.77,86.589) v1@108.511,85.837 ; v1@107.991,81.893 ccw(c107.924,82.525) 108.56,82.525 ; v1@107.991,81.893 ccw(c107.924,82.525) 108.56,82.525 ; v1@107.991,81.893 ccw(c107.924,82.525) 108.56,82.525 ; v1@108.081,81.936 ccw(c106.926,83.091) 108.56,83.091 ; v1@108.081,81.936 ccw(c106.926,83.091) 108.56,83.091 ; v1@108.081,81.936 ccw(c106.926,83.091) 108.56,83.091 ; 108.179,72.517 108.179,73.254 ; 108.179,73.254 108.864,72.568 112.014,72.568 ; v1@108.285,71.054 ccw(c109.003,70.548) 108.382,69.926 ; v1@108.285,71.054 ccw(c109.003,70.548) 108.382,69.926 ; v1@108.285,71.054 ccw(c109.003,70.548) 108.382,69.926 ; 108.382,69.926 112.42,69.926 v1(112.42,70.841) 112.42,72.161 112.014,72.568 ; v1@108.454,86.085 cw(c109.669,84.869) 109.669,86.589 ; v1@108.454,86.085 cw(c109.669,84.869) 109.669,86.589 ; v1@108.454,86.085 cw(c109.669,84.869) 109.669,86.589 ; 108.56,82.525 109.466,82.525 ; 108.56,82.525 v1@108.56,86.081 ; 108.772,82.525 cw(c108.772,81.239) v1@109.681,82.148 ; 108.772,82.525 cw(c108.772,81.239) v1@109.681,82.148 ; 108.772,82.525 cw(c108.772,81.239) v1@109.681,82.148 ; v1@109.292,71.099 cw(c109.649,70.742) 109.649,71.247 ; v1@109.292,71.099 cw(c109.649,70.742) 109.649,71.247 ; v1@109.292,71.099 cw(c109.649,70.742) 109.649,71.247 ; 109.466,82.525 110.583,82.525 ; 109.466,82.525 109.466,81.788 111.992,81.788 112.513,82.309 112.308,82.309 112.092,82.525 ; v1@109.469,81.936 ccw(c109.826,82.293) 109.826,81.788 ; v1@109.469,81.936 ccw(c109.826,82.293) 109.826,81.788 ; v1@109.469,81.936 ccw(c109.826,82.293) 109.826,81.788 ; v1@109.469,82.148 cw(c110.378,81.239) 110.378,82.525 ; v1@109.469,82.148 cw(c110.378,81.239) 110.378,82.525 ; v1@109.469,82.148 cw(c110.378,81.239) 110.378,82.525 ; 109.509,80.315 ccw(c109.509,81.6) v1@110.418,80.691 ; 109.509,80.315 ccw(c109.509,81.6) v1@110.418,80.691 ; 109.509,80.315 ccw(c109.509,81.6) v1@110.418,80.691 ; 109.985,71.247 ccw(c109.985,71.752) v1@110.342,71.395